# Altium PCB RGB_Plugin_Board.PcbDoc (part 2 of 3)
Units mil, origin at the board's own origin, x right, y up, seen from the top; angles counter-clockwise.
Board outline 2420 x 984.41 mil, 2 copper layers (TOP, BOTTOM), stack 81.54 mil thick; 20 components, 19 nets, 2525 pads, 9 vias.
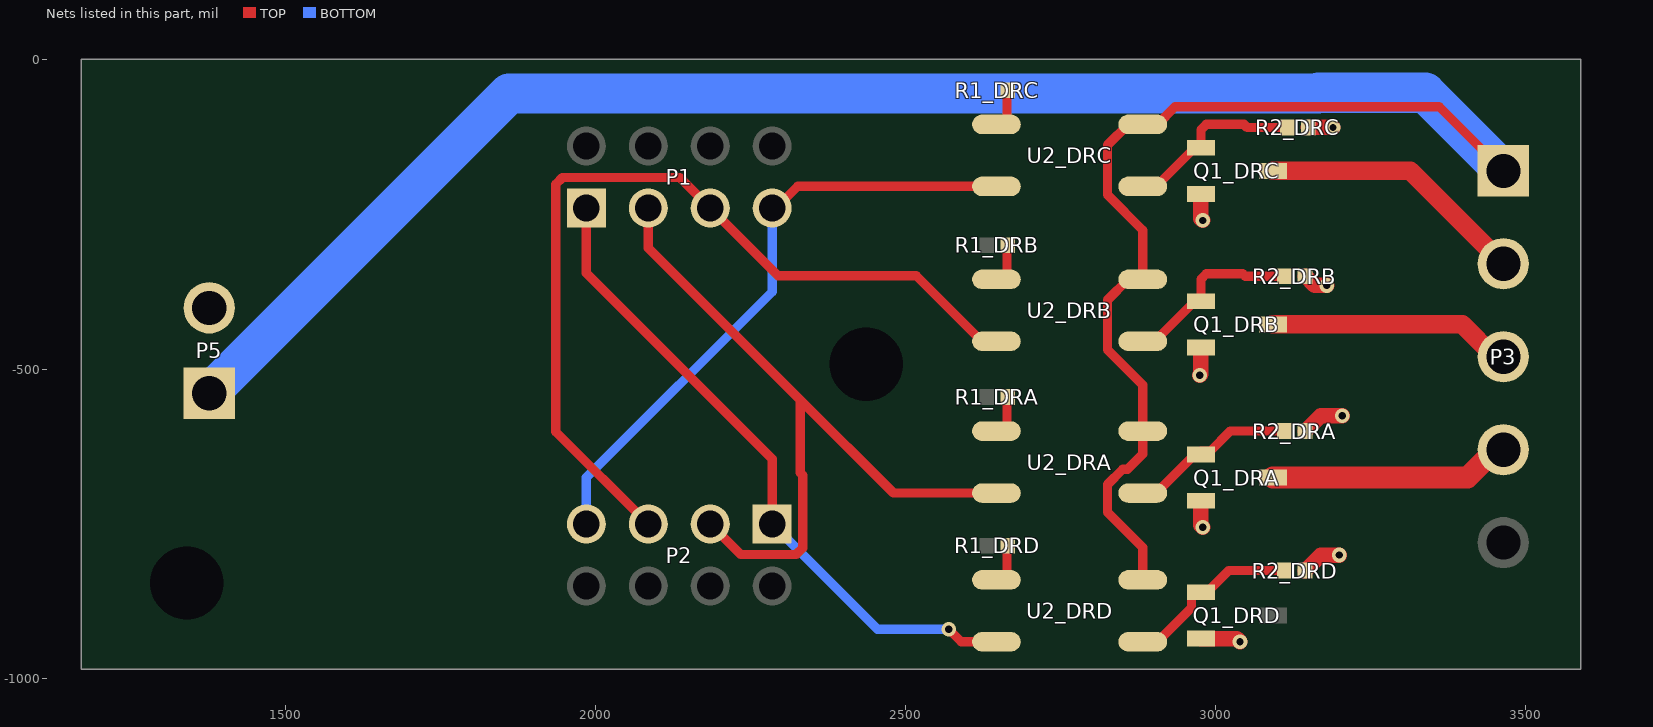
[diagram p2: the nets of this part, all layers, seen from the top]

## Free pads (board coordinates)
  round 0.93 on Top Overlay: 1(1215.25,-148.08) 1(1215.25,-148.08) 1(1215.51,-144.27) 1(1215.51,-144.27) 1(1215.77,-148.33) 1(1215.77,-148.33) 1(1216.01,-143.26) 1(1216.01,-143.26) 1(1216.52,-140.2) 1(1216.52,-140.2) 1(1217.27,-147.82) 1(1217.27,-147.82) 1(1217.79,-137.15) 1(1217.79,-137.15) 1(1218.05,-135.39) 1(1218.05,-135.39) 1(1219.06,-133.34) 1(1219.06,-133.34) 1(1219.32,-145.8) 1(1219.32,-145.8) 1(1219.32,-132.07) 1(1219.32,-132.07) 1(1219.57,-145.02) 1(1219.57,-145.02) 1(1220.07,-144.76) 1(1220.07,-144.76) 1(1220.33,-144.01) 1(1220.33,-144.01) 1(1221.08,-143.26) 1(1221.08,-143.26) 1(1221.08,-128.52) 1(1221.08,-128.52) 1(1221.34,-142.48) 1(1221.34,-142.48) 1(1221.86,-125.73) 1(1221.86,-125.73) 1(1222.11,-141.73) 1(1222.11,-141.73) 1(1222.61,-124.72) 1(1222.61,-124.72) 1(1222.87,-123.45) 1(1222.87,-123.45) 1(1223.12,-139.45) 1(1223.12,-139.45) 1(1223.62,-139.19) 1(1223.62,-139.19) 1(1223.62,-122.18) 1(1223.62,-122.18) 1(1223.88,-120.91) 1(1223.88,-120.91) 1(1223.88,-138.42) 1(1223.88,-138.42) 1(1224.39,-138.18) 1(1224.39,-138.18) 1(1224.39,-38.41) 1(1224.39,-38.41) 1(1224.65,-137.41) 1(1224.65,-137.41) 1(1224.65,-32.33) 1(1224.65,-32.33) 1(1225.15,-45.77) 1(1225.15,-45.77) 1(1225.15,-31.57) 1(1225.15,-31.57) 1(1225.4,-136.65) 1(1225.4,-136.65) 1(1225.41,-118.37) 1(1225.41,-118.37) 1(1225.66,-46.8) 1(1225.66,-46.8) 1(1225.66,-117.1) 1(1225.66,-117.1) 1(1225.66,-135.88) 1(1225.66,-135.88) 1(1225.92,-49.08) 1(1225.92,-49.08) 1(1225.92,-31.31) 1(1225.92,-31.31) 1(1226.16,-31.81) 1(1226.16,-31.81) 1(1226.42,-135.13) 1(1226.42,-135.13) 1(1226.67,-51.36) 1(1226.67,-51.36) 1(1226.67,-31.81) 1(1226.67,-31.81) 1(1227.19,-114.3) 1(1227.19,-114.3) 1(1227.43,-132.85) 1(1227.43,-132.85) 1(1227.43,-113.04) 1(1227.43,-113.04) 1(1227.94,-58.46) 1(1227.94,-58.46) 1(1227.94,-33.6) 1(1227.94,-33.6) 1(1228.2,-132.07) 1(1228.2,-132.07) 1(1228.46,-131.32) 1(1228.46,-131.32) 1(1228.46,-34.86) 1(1228.46,-34.86) 1(1228.7,-34.87) 1(1228.7,-34.87) 1(1229.21,-130.57) 1(1229.21,-130.57) 1(1229.21,-62.03) 1(1229.21,-62.03) 1(1229.47,-129.79) 1(1229.47,-129.79) 1(1229.47,-36.65) 1(1229.47,-36.65) 1(1229.73,-36.65) 1(1229.73,-36.65) 1(1229.97,-108.48) 1(1229.97,-108.48) 1(1229.97,-37.92) 1(1229.97,-37.92) 1(1230.22,-129.04) 1(1230.22,-129.04) 1(1230.22,-107.21) 1(1230.22,-107.21) 1(1230.22,-37.92) 1(1230.22,-37.92) 1(1230.48,-128.27) 1(1230.48,-128.27) 1(1230.48,-67.86) 1(1230.48,-67.86) 1(1230.74,-39.68) 1(1230.74,-39.68) 1(1231,-39.68) 1(1231,-39.68) 1(1231.24,-127.51) 1(1231.24,-127.51) 1(1231.49,-126.76) 1(1231.49,-126.76) 1(1231.75,-42.22) 1(1231.75,-42.22) 1(1232.01,-42.22) 1(1232.01,-42.22) 1(1232.27,-43.49) 1(1232.27,-43.49) 1(1232.5,-43.49) 1(1232.5,-43.49) 1(1233.02,-124.72) 1(1233.02,-124.72) 1(1233.28,-123.96) 1(1233.28,-123.96) 1(1233.28,-101.38) 1(1233.28,-101.38) 1(1233.28,-45.77) 1(1233.28,-45.77) 1(1233.54,-45.77) 1(1233.54,-45.77) 1(1233.77,-77) 1(1233.77,-77) 1(1233.77,-47.04) 1(1233.77,-47.04) 1(1234.03,-78.77) 1(1234.03,-78.77) 1(1234.03,-47.04) 1(1234.03,-47.04) 1(1234.29,-48.31) 1(1234.29,-48.31) 1(1234.55,-122.18) 1(1234.55,-122.18) 1(1234.55,-99.59) 1(1234.55,-99.59) 1(1234.55,-48.31) 1(1234.55,-48.31) 1(1234.8,-80.3) 1(1234.8,-80.3) 1(1234.8,-49.58) 1(1234.8,-49.58) 1(1235.04,-120.91) 1(1235.04,-120.91) 1(1235.04,-98.32) 1(1235.04,-98.32) 1(1235.04,-82.08) 1(1235.04,-82.08) 1(1235.04,-49.58) 1(1235.04,-49.58) 1(1235.56,-120.65) 1(1235.56,-120.65) 1(1235.56,-51.62) 1(1235.56,-51.62) 1(1235.82,-119.9) 1(1235.82,-119.9) 1(1235.82,-51.62) 1(1235.82,-51.62) 1(1236.07,-52.89) 1(1236.07,-52.89) 1(1236.31,-52.89) 1(1236.31,-52.89) 1(1236.57,-119.14) 1(1236.57,-119.14) 1(1236.57,-85.89) 1(1236.57,-85.89) 1(1236.57,-54.16) 1(1236.57,-54.16) 1(1236.83,-87.16) 1(1236.83,-87.16) 1(1236.83,-54.16) 1(1236.83,-54.16) 1(1236.83,-118.37) 1(1236.83,-118.37) 1(1236.83,-95.03) 1(1236.83,-95.03) 1(1237.09,-55.43) 1(1237.09,-55.43) 1(1237.34,-55.43) 1(1237.34,-55.43) 1(1237.58,-56.7) 1(1237.58,-56.7) 1(1237.84,-117.36) 1(1237.84,-117.36) 1(1237.84,-89.18) 1(1237.84,-89.18) 1(1237.84,-56.7) 1(1237.84,-56.7) 1(1238.1,-116.61) 1(1238.1,-116.61) 1(1238.1,-93.25) 1(1238.1,-93.25) 1(1238.1,-90.45) 1(1238.1,-90.45) 1(1238.1,-57.97) 1(1238.1,-57.97) 1(1238.35,-57.97) 1(1238.35,-57.97) 1(1238.61,-91.98) 1(1238.61,-91.98) 1(1238.85,-115.83) 1(1238.85,-115.83) 1(1238.85,-91.72) 1(1238.85,-91.72) 1(1238.85,-59.73) 1(1238.85,-59.73) 1(1239.11,-115.08) 1(1239.11,-115.08) 1(1239.11,-59.73) 1(1239.11,-59.73) 1(1239.37,-61) 1(1239.37,-61) 1(1239.62,-61) 1(1239.62,-61) 1(1239.88,-114.3) 1(1239.88,-114.3) 1(1240.12,-62.79) 1(1240.12,-62.79) 1(1240.38,-113.04) 1(1240.38,-113.04) 1(1240.38,-62.79) 1(1240.38,-62.79) 1(1240.89,-112.8) 1(1240.89,-112.8) 1(1241.15,-112.02) 1(1241.15,-112.02) 1(1241.39,-64.81) 1(1241.39,-64.81) 1(1242.16,-111.01) 1(1242.16,-111.01) 1(1242.42,-68.38) 1(1242.42,-68.38) 1(1242.42,-110.26) 1(1242.42,-110.26) 1(1242.66,-68.38) 1(1242.66,-68.38) 1(1242.92,-110) 1(1242.92,-110) 1(1242.92,-69.65) 1(1242.92,-69.65) 1(1243.17,-109.23) 1(1243.17,-109.23) 1(1243.17,-69.65) 1(1243.17,-69.65) 1(1243.69,-108.99) 1(1243.69,-108.99) 1(1243.93,-108.22) 1(1243.93,-108.22) 1(1244.44,-107.96) 1(1244.44,-107.96) 1(1244.7,-107.21) 1(1244.7,-107.21) 1(1245.45,-106.69) 1(1245.45,-106.69) 1(1245.97,-75.22) 1(1245.97,-75.22) 1(1246.23,-76.49) 1(1246.23,-76.49) 1(1246.46,-76.49) 1(1246.46,-76.49) 1(1246.98,-78.02) 1(1246.98,-78.02) 1(1247.73,-111.01) 1(1247.73,-111.01) 1(1248.51,-76.49) 1(1248.51,-76.49) 1(1248.77,-75.74) 1(1248.77,-75.74) 1(1249.78,-73.95) 1(1249.78,-73.95) 1(1250.53,-73.2) 1(1250.53,-73.2) 1(1250.79,-72.42) 1(1250.79,-72.42) 1(1251.3,-117.87) 1(1251.3,-117.87) 1(1251.54,-118.63) 1(1251.54,-118.63) 1(1251.8,-71.67) 1(1251.8,-71.67) 1(1252.06,-70.92) 1(1252.06,-70.92) 1(1252.57,-70.66) 1(1252.57,-70.66) 1(1252.81,-69.88) 1(1252.81,-69.88) 1(1252.81,-120.41) 1(1252.81,-120.41) 1(1253.07,-121.17) 1(1253.07,-121.17) 1(1253.84,-121.92) 1(1253.84,-121.92) 1(1254.08,-122.69) 1(1254.08,-122.69) 1(1254.34,-68.38) 1(1254.34,-68.38) 1(1254.6,-67.6) 1(1254.6,-67.6) 1(1254.85,-123.45) 1(1254.85,-123.45) 1(1255.11,-124.22) 1(1255.11,-124.22) 1(1255.35,-94) 1(1255.35,-94) 1(1255.61,-124.46) 1(1255.61,-124.46) 1(1255.61,-94) 1(1255.61,-94) 1(1255.61,-65.84) 1(1255.61,-65.84) 1(1255.86,-125.23) 1(1255.86,-125.23) 1(1256.12,-95.27) 1(1256.12,-95.27) 1(1256.38,-95.27) 1(1256.38,-95.27) 1(1256.62,-65.07) 1(1256.62,-65.07) 1(1256.62,-92.73) 1(1256.62,-92.73) 1(1256.88,-91.98) 1(1256.88,-91.98) 1(1256.88,-64.31) 1(1256.88,-64.31) 1(1257.13,-127) 1(1257.13,-127) 1(1257.13,-97.05) 1(1257.13,-97.05) 1(1257.39,-97.05) 1(1257.39,-97.05) 1(1257.39,-127.77) 1(1257.39,-127.77) 1(1257.89,-98.32) 1(1257.89,-98.32) 1(1257.89,-91.22) 1(1257.89,-91.22) 1(1258.14,-98.32) 1(1258.14,-98.32) 1(1258.14,-90.45) 1(1258.14,-90.45) 1(1258.15,-128.52) 1(1258.15,-128.52) 1(1258.4,-129.3) 1(1258.4,-129.3) 1(1258.66,-99.59) 1(1258.66,-99.59) 1(1258.92,-99.59) 1(1258.92,-99.59) 1(1259.16,-130.05) 1(1259.16,-130.05) 1(1259.16,-89.7) 1(1259.16,-89.7) 1(1259.41,-130.8) 1(1259.41,-130.8) 1(1259.41,-100.86) 1(1259.41,-100.86) 1(1259.41,-88.92) 1(1259.41,-88.92) 1(1259.41,-62.03) 1(1259.41,-62.03) 1(1259.67,-100.86) 1(1259.67,-100.86) 1(1259.67,-61.26) 1(1259.67,-61.26) 1(1259.93,-131.06) 1(1259.93,-131.06) 1(1260.19,-131.84) 1(1260.19,-131.84) 1(1260.19,-102.13) 1(1260.19,-102.13) 1(1260.43,-102.13) 1(1260.43,-102.13) 1(1260.68,-132.07) 1(1260.68,-132.07) 1(1260.68,-87.91) 1(1260.68,-87.91) 1(1260.68,-102.88) 1(1260.68,-102.88) 1(1260.68,-60.51) 1(1260.68,-60.51) 1(1260.94,-132.85) 1(1260.94,-132.85) 1(1260.94,-102.88) 1(1260.94,-102.88) 1(1260.94,-87.16) 1(1260.94,-87.16) 1(1260.94,-59.73) 1(1260.94,-59.73) 1(1261.2,-103.66) 1(1261.2,-103.66) 1(1261.46,-133.1) 1(1261.46,-133.1) 1(1261.46,-103.66) 1(1261.46,-103.66) 1(1261.69,-133.86) 1(1261.69,-133.86) 1(1261.69,-104.41) 1(1261.69,-104.41) 1(1261.95,-104.41) 1(1261.95,-104.41) 1(1261.95,-58.98) 1(1261.95,-58.98) 1(1262.21,-105.18) 1(1262.21,-105.18) 1(1262.21,-58.22) 1(1262.21,-58.22) 1(1262.47,-134.37) 1(1262.47,-134.37) 1(1262.47,-105.18) 1(1262.47,-105.18) 1(1262.73,-135.13) 1(1262.73,-135.13) 1(1262.73,-105.94) 1(1262.73,-105.94) 1(1262.96,-105.94) 1(1262.96,-105.94) 1(1263.48,-57.19) 1(1263.48,-57.19) 1(1263.74,-135.88) 1(1263.74,-135.88) 1(1263.74,-56.44) 1(1263.74,-56.44) 1(1264,-136.65) 1(1264,-136.65) 1(1264,-107.72) 1(1264,-107.72) 1(1264.23,-107.72) 1(1264.23,-107.72) 1(1264.75,-108.73) 1(1264.75,-108.73) 1(1265.01,-108.73) 1(1265.01,-108.73) 1(1265.01,-137.41) 1(1265.01,-137.41) 1(1265.26,-138.18) 1(1265.26,-138.18) 1(1265.26,-109.49) 1(1265.26,-109.49) 1(1265.5,-109.49) 1(1265.5,-109.49) 1(1266.02,-110.5) 1(1266.02,-110.5) 1(1266.28,-138.93) 1(1266.28,-138.93) 1(1266.28,-110.5) 1(1266.28,-110.5) 1(1266.53,-139.69) 1(1266.53,-139.69) 1(1266.53,-111.27) 1(1266.53,-111.27) 1(1266.77,-111.27) 1(1266.77,-111.27) 1(1267.29,-112.28) 1(1267.29,-112.28) 1(1267.55,-140.46) 1(1267.55,-140.46) 1(1267.55,-112.28) 1(1267.55,-112.28) 1(1267.8,-141.22) 1(1267.8,-141.22) 1(1267.8,-113.04) 1(1267.8,-113.04) 1(1267.8,-80.55) 1(1267.8,-80.55) 1(1268.04,-113.04) 1(1268.04,-113.04) 1(1268.04,-79.8) 1(1268.04,-79.8) 1(1268.56,-114.07) 1(1268.56,-114.07) 1(1268.81,-114.07) 1(1268.81,-114.07) 1(1269.07,-114.82) 1(1269.07,-114.82) 1(1269.31,-114.82) 1(1269.31,-114.82) 1(1269.31,-78.53) 1(1269.31,-78.53) 1(1269.83,-115.83) 1(1269.83,-115.83) 1(1270.08,-115.83) 1(1270.08,-115.83) 1(1270.08,-78.27) 1(1270.08,-78.27) 1(1270.84,-116.61) 1(1270.84,-116.61) 1(1270.84,-77.26) 1(1270.84,-77.26) 1(1271.09,-117.36) 1(1271.09,-117.36) 1(1271.35,-117.36) 1(1271.35,-117.36) 1(1271.61,-77) 1(1271.61,-77) 1(1272.36,-118.37) 1(1272.36,-118.37) 1(1272.36,-47.81) 1(1272.36,-47.81) 1(1272.62,-119.14) 1(1272.62,-119.14) 1(1272.88,-119.14) 1(1272.88,-119.14) 1(1273.12,-47.56) 1(1273.12,-47.56) 1(1274.15,-74.21) 1(1274.15,-74.21) 1(1274.9,-73.95) 1(1274.9,-73.95) 1(1275.42,-45.02) 1(1275.42,-45.02) 1(1275.42,-121.68) 1(1275.42,-121.68) 1(1275.66,-122.44) 1(1275.66,-122.44) 1(1275.66,-72.94) 1(1275.66,-72.94) 1(1275.91,-122.44) 1(1275.91,-122.44) 1(1276.17,-44.76) 1(1276.17,-44.76) 1(1276.43,-72.68) 1(1276.43,-72.68) 1(1277.18,-150.61) 1(1277.18,-150.61) 1(1277.18,-43.75) 1(1277.18,-43.75) 1(1277.44,-71.41) 1(1277.44,-71.41) 1(1277.96,-150.87) 1(1277.96,-150.87) 1(1277.96,-43.49) 1(1277.96,-43.49) 1(1278.19,-71.15) 1(1278.19,-71.15) 1(1278.71,-42.48) 1(1278.71,-42.48) 1(1278.71,-151.88) 1(1278.71,-151.88) 1(1279.46,-152.14) 1(1279.46,-152.14) 1(1279.46,-42.22) 1(1279.46,-42.22) 1(1279.72,-69.65) 1(1279.72,-69.65) 1(1280.49,-40.95) 1(1280.49,-40.95) 1(1280.49,-153.41) 1(1280.49,-153.41) 1(1280.49,-69.39) 1(1280.49,-69.39) 1(1280.73,-68.87) 1(1280.73,-68.87) 1(1281.25,-153.65) 1(1281.25,-153.65) 1(1281.25,-40.69) 1(1281.25,-40.69) 1(1281.51,-68.62) 1(1281.51,-68.62) 1(1282,-154.68) 1(1282,-154.68) 1(1282,-39.68) 1(1282,-39.68) 1(1282.52,-129.3) 1(1282.52,-129.3) 1(1282.77,-154.92) 1(1282.77,-154.92) 1(1282.77,-39.43) 1(1282.77,-39.43) 1(1283.03,-129.3) 1(1283.03,-129.3) 1(1283.03,-67.11) 1(1283.03,-67.11) 1(1283.27,-155.69) 1(1283.27,-155.69) 1(1283.79,-66.85) 1(1283.79,-66.85) 1(1283.79,-38.41) 1(1283.79,-38.41) 1(1284.04,-155.95) 1(1284.04,-155.95) 1(1284.04,-130.57) 1(1284.04,-130.57) 1(1284.3,-156.44) 1(1284.3,-156.44) 1(1284.54,-130.57) 1(1284.54,-130.57) 1(1284.54,-38.16) 1(1284.54,-38.16) 1(1284.8,-65.84) 1(1284.8,-65.84) 1(1285.06,-156.7) 1(1285.06,-156.7) 1(1285.31,-157.22) 1(1285.31,-157.22) 1(1285.57,-65.58) 1(1285.57,-65.58) 1(1285.57,-37.15) 1(1285.57,-37.15) 1(1285.81,-132.07) 1(1285.81,-132.07) 1(1286.07,-157.46) 1(1286.07,-157.46) 1(1286.32,-132.07) 1(1286.32,-132.07) 1(1286.32,-36.89) 1(1286.32,-36.89) 1(1286.58,-64.57) 1(1286.58,-64.57) 1(1286.84,-158.23) 1(1286.84,-158.23) 1(1287.34,-133.34) 1(1287.34,-133.34) 1(1287.34,-64.31) 1(1287.34,-64.31) 1(1287.34,-35.88) 1(1287.34,-35.88) 1(1287.59,-158.49) 1(1287.59,-158.49) 1(1287.85,-133.34) 1(1287.85,-133.34) 1(1288.35,-159.24) 1(1288.35,-159.24) 1(1288.35,-134.12) 1(1288.35,-134.12) 1(1288.35,-63.3) 1(1288.35,-63.3) 1(1288.86,-134.12) 1(1288.86,-134.12) 1(1289.12,-134.61) 1(1289.12,-134.61) 1(1289.12,-63.04) 1(1289.12,-63.04) 1(1289.38,-62.53) 1(1289.38,-62.53) 1(1289.62,-159.76) 1(1289.62,-159.76) 1(1289.62,-134.61) 1(1289.62,-134.61) 1(1290.13,-34.61) 1(1290.13,-34.61) 1(1290.13,-135.39) 1(1290.13,-135.39) 1(1290.39,-160.51) 1(1290.39,-160.51) 1(1290.65,-135.39) 1(1290.65,-135.39) 1(1290.88,-135.88) 1(1290.88,-135.88) 1(1291.14,-160.77) 1(1291.14,-160.77) 1(1291.14,-61.77) 1(1291.14,-61.77) 1(1291.14,-33.6) 1(1291.14,-33.6) 1(1291.4,-135.88) 1(1291.4,-135.88) 1(1291.92,-61) 1(1291.92,-61) 1(1291.92,-161.52) 1(1291.92,-161.52) 1(1291.92,-136.65) 1(1291.92,-136.65) 1(1292.41,-136.65) 1(1292.41,-136.65) 1(1292.67,-161.78) 1(1292.67,-161.78) 1(1292.67,-137.15) 1(1292.67,-137.15) 1(1292.67,-60.76) 1(1292.67,-60.76) 1(1292.93,-60.25) 1(1292.93,-60.25) 1(1292.93,-32.84) 1(1292.93,-32.84) 1(1293.19,-137.15) 1(1293.19,-137.15) 1(1293.68,-137.92) 1(1293.68,-137.92) 1(1294.2,-137.92) 1(1294.2,-137.92) 1(1294.46,-163.05) 1(1294.46,-163.05) 1(1294.46,-138.42) 1(1294.46,-138.42) 1(1294.69,-59.24) 1(1294.69,-59.24) 1(1294.95,-138.42) 1(1294.95,-138.42) 1(1294.95,-31.57) 1(1294.95,-31.57) 1(1295.21,-163.31) 1(1295.21,-163.31) 1(1295.21,-138.93) 1(1295.21,-138.93) 1(1295.72,-138.93) 1(1295.72,-138.93) 1(1295.96,-58.72) 1(1295.96,-58.72) 1(1295.96,-139.45) 1(1295.96,-139.45) 1(1296.48,-139.45) 1(1296.48,-139.45) 1(1296.74,-139.95) 1(1296.74,-139.95) 1(1296.74,-57.97) 1(1296.74,-57.97) 1(1296.74,-30.54) 1(1296.74,-30.54) 1(1296.99,-164.58) 1(1296.99,-164.58) 1(1297.23,-139.95) 1(1297.23,-139.95) 1(1297.49,-140.46) 1(1297.49,-140.46) 1(1298,-140.46) 1(1298,-140.46) 1(1298.5,-56.96) 1(1298.5,-56.96) 1(1298.76,-141.22) 1(1298.76,-141.22) 1(1299.27,-141.22) 1(1299.27,-141.22) 1(1300.28,-55.92) 1(1300.28,-55.92) 1(1301.55,-55.69) 1(1301.55,-55.69) 1(1301.81,-167.11) 1(1301.81,-167.11) 1(1303.08,-167.37) 1(1303.08,-167.37) 1(1303.58,-167.87) 1(1303.58,-167.87) 1(1304.85,-168.12) 1(1304.85,-168.12) 1(1304.85,-26.24) 1(1304.85,-26.24) 1(1305.88,-168.88) 1(1305.88,-168.88) 1(1306.12,-53.15) 1(1306.12,-53.15) 1(1307.15,-169.14) 1(1307.15,-169.14) 1(1307.38,-52.89) 1(1307.38,-52.89) 1(1307.64,-25.46) 1(1307.64,-25.46) 1(1307.9,-145.8) 1(1307.9,-145.8) 1(1307.9,-52.37) 1(1307.9,-52.37) 1(1308.65,-145.8) 1(1308.65,-145.8) 1(1308.91,-170.15) 1(1308.91,-170.15) 1(1309.17,-24.45) 1(1309.17,-24.45) 1(1309.68,-146.55) 1(1309.68,-146.55) 1(1309.92,-51.88) 1(1309.92,-51.88) 1(1310.44,-146.55) 1(1310.44,-146.55) 1(1310.95,-147.07) 1(1310.95,-147.07) 1(1311.71,-147.07) 1(1311.71,-147.07) 1(1311.96,-50.85) 1(1311.96,-50.85) 1(1312.98,-147.82) 1(1312.98,-147.82) 1(1313.23,-171.67) 1(1313.23,-171.67) 1(1313.49,-23.18) 1(1313.49,-23.18) 1(1313.73,-147.82) 1(1313.73,-147.82) 1(1315.77,-148.83) 1(1315.77,-148.83) 1(1316.27,-49.58) 1(1316.27,-49.58) 1(1316.53,-148.83) 1(1316.53,-148.83) 1(1317.54,-173.2) 1(1317.54,-173.2) 1(1318.05,-149.6) 1(1318.05,-149.6) 1(1318.05,-21.42) 1(1318.05,-21.42) 1(1318.31,-48.57) 1(1318.31,-48.57) 1(1319.06,-149.6) 1(1319.06,-149.6) 1(1319.58,-150.1) 1(1319.58,-150.1) 1(1320.33,-150.1) 1(1320.33,-150.1) 1(1320.33,-21.16) 1(1320.33,-21.16) 1(1320.85,-48.07) 1(1320.85,-48.07) 1(1322.12,-150.61) 1(1322.12,-150.61) 1(1322.38,-47.3) 1(1322.38,-47.3) 1(1322.61,-20.15) 1(1322.61,-20.15) 1(1324.4,-151.37) 1(1324.4,-151.37) 1(1324.66,-174.99) 1(1324.66,-174.99) 1(1325.67,-151.37) 1(1325.67,-151.37) 1(1326.42,-151.88) 1(1326.42,-151.88) 1(1326.42,-46.29) 1(1326.42,-46.29) 1(1326.94,-175.22) 1(1326.94,-175.22) 1(1327.45,-19.38) 1(1327.45,-19.38) 1(1327.69,-151.88) 1(1327.69,-151.88) 1(1328.72,-152.38) 1(1328.72,-152.38) 1(1328.72,-46.03) 1(1328.72,-46.03) 1(1330.23,-152.38) 1(1330.23,-152.38) 1(1331,-45.27) 1(1331,-45.27) 1(1331.26,-152.9) 1(1331.26,-152.9) 1(1331.76,-176.49) 1(1331.76,-176.49) 1(1332.27,-18.11) 1(1332.27,-18.11) 1(1332.53,-152.9) 1(1332.53,-152.9) 1(1333.54,-153.41) 1(1333.54,-153.41) 1(1334.29,-45.02) 1(1334.29,-45.02) 1(1334.81,-153.41) 1(1334.81,-153.41) 1(1335.56,-44.5) 1(1335.56,-44.5) 1(1335.82,-153.91) 1(1335.82,-153.91) 1(1337.09,-153.91) 1(1337.09,-153.91) 1(1338.62,-17.35) 1(1338.62,-17.35) 1(1338.87,-44.26) 1(1338.87,-44.26) 1(1339.37,-154.42) 1(1339.37,-154.42) 1(1339.89,-16.84) 1(1339.89,-16.84) 1(1340.14,-43.75) 1(1340.14,-43.75) 1(1341.91,-154.42) 1(1341.91,-154.42) 1(1343.44,-43.23) 1(1343.44,-43.23) 1(1344.19,-154.92) 1(1344.19,-154.92) 1(1344.45,-178.28) 1(1344.45,-178.28) 1(1346.73,-154.92) 1(1346.73,-154.92) 1(1347.76,-16.08) 1(1347.76,-16.08) 1(1350.53,-42.74) 1(1350.53,-42.74) 1(1351.8,-155.69) 1(1351.8,-155.69) 1(1353.07,-15.83) 1(1353.07,-15.83) 1(1356.88,-155.69) 1(1356.88,-155.69) 1(1358.15,-179.03) 1(1358.15,-179.03) 1(1362.73,-42.48) 1(1362.73,-42.48) 1(1369.57,-16.08) 1(1369.57,-16.08) 1(1370.6,-42.99) 1(1370.6,-42.99) 1(1372.37,-16.08) 1(1372.37,-16.08) 1(1375.68,-43.75) 1(1375.68,-43.75) 1(1376.95,-155.95) 1(1376.95,-155.95) 1(1380.5,-44.01) 1(1380.5,-44.01) 1(1381,-17.1) 1(1381,-17.1) 1(1381.51,-178.79) 1(1381.51,-178.79) 1(1382.52,-44.5) 1(1382.52,-44.5) 1(1384.05,-17.1) 1(1384.05,-17.1) 1(1385.83,-44.76) 1(1385.83,-44.76) 1(1388.61,-45.53) 1(1388.61,-45.53) 1(1390.91,-154.92) 1(1390.91,-154.92) 1(1391.15,-18.11) 1(1391.15,-18.11) 1(1392.68,-46.03) 1(1392.68,-46.03) 1(1393.45,-154.42) 1(1393.45,-154.42) 1(1395.73,-19.12) 1(1395.73,-19.12) 1(1398.53,-47.56) 1(1398.53,-47.56) 1(1398.76,-154.16) 1(1398.76,-154.16) 1(1398.76,-19.12) 1(1398.76,-19.12) 1(1399.79,-177.27) 1(1399.79,-177.27) 1(1400.29,-47.81) 1(1400.29,-47.81) 1(1401.06,-48.31) 1(1401.06,-48.31) 1(1401.82,-20.15) 1(1401.82,-20.15) 1(1403.34,-20.15) 1(1403.34,-20.15) 1(1405.37,-49.08) 1(1405.37,-49.08) 1(1406.14,-49.58) 1(1406.14,-49.58) 1(1407.9,-21.42) 1(1407.9,-21.42) 1(1408.68,-50.09) 1(1408.68,-50.09) 1(1409.43,-21.42) 1(1409.43,-21.42) 1(1409.95,-50.85) 1(1409.95,-50.85) 1(1412.72,-51.36) 1(1412.72,-51.36) 1(1414.25,-175.48) 1(1414.25,-175.48) 1(1417.56,-174.73) 1(1417.56,-174.73) 1(1418.06,-53.39) 1(1418.06,-53.39) 1(1418.83,-151.37) 1(1418.83,-151.37) 1(1420.1,-150.87) 1(1420.1,-150.87) 1(1420.85,-174.47) 1(1420.85,-174.47) 1(1422.38,-54.65) 1(1422.38,-54.65) 1(1422.88,-150.61) 1(1422.88,-150.61) 1(1423.65,-55.43) 1(1423.65,-55.43) 1(1423.91,-24.97) 1(1423.91,-24.97) 1(1427.2,-173.2) 1(1427.2,-173.2) 1(1427.2,-56.44) 1(1427.2,-56.44) 1(1428.47,-26.73) 1(1428.47,-26.73) 1(1428.98,-57.45) 1(1428.98,-57.45) 1(1429.22,-149.35) 1(1429.22,-149.35) 1(1429.48,-26.73) 1(1429.48,-26.73) 1(1430.49,-172.94) 1(1430.49,-172.94) 1(1433.29,-149.09) 1(1433.29,-149.09) 1(1433.55,-172.19) 1(1433.55,-172.19) 1(1434.81,-59.24) 1(1434.81,-59.24) 1(1435.57,-148.33) 1(1435.57,-148.33) 1(1436.34,-171.93) 1(1436.34,-171.93) 1(1436.6,-60.25) 1(1436.6,-60.25) 1(1437.61,-171.42) 1(1437.61,-171.42) 1(1437.87,-60.51) 1(1437.87,-60.51) 1(1437.87,-29.53) 1(1437.87,-29.53) 1(1438.88,-148.08) 1(1438.88,-148.08) 1(1438.88,-29.53) 1(1438.88,-29.53) 1(1439.14,-61.26) 1(1439.14,-61.26) 1(1439.89,-30.3) 1(1439.89,-30.3) 1(1440.64,-30.3) 1(1440.64,-30.3) 1(1441.16,-30.8) 1(1441.16,-30.8) 1(1441.91,-147.3) 1(1441.91,-147.3) 1(1441.91,-30.8) 1(1441.91,-30.8) 1(1443.44,-62.53) 1(1443.44,-62.53) 1(1444.21,-31.81) 1(1444.21,-31.81) 1(1444.71,-63.3) 1(1444.71,-63.3) 1(1445.23,-147.07) 1(1445.23,-147.07) 1(1445.23,-31.81) 1(1445.23,-31.81) 1(1445.98,-63.54) 1(1445.98,-63.54) 1(1446.24,-32.58) 1(1446.24,-32.58) 1(1446.5,-64.05) 1(1446.5,-64.05) 1(1446.75,-169.91) 1(1446.75,-169.91) 1(1446.99,-32.58) 1(1446.99,-32.58) 1(1447.51,-33.08) 1(1447.51,-33.08) 1(1447.76,-64.31) 1(1447.76,-64.31) 1(1448.26,-33.08) 1(1448.26,-33.08) 1(1449.03,-169.14) 1(1449.03,-169.14) 1(1450.56,-34.11) 1(1450.56,-34.11) 1(1450.8,-146.03) 1(1450.8,-146.03) 1(1451.06,-66.08) 1(1451.06,-66.08) 1(1451.31,-168.88) 1(1451.31,-168.88) 1(1451.57,-34.11) 1(1451.57,-34.11) 1(1451.83,-145.54) 1(1451.83,-145.54) 1(1452.58,-34.87) 1(1452.58,-34.87) 1(1453.1,-66.59) 1(1453.1,-66.59) 1(1453.34,-34.87) 1(1453.34,-34.87) 1(1453.59,-168.12) 1(1453.59,-168.12) 1(1453.85,-35.38) 1(1453.85,-35.38) 1(1454.61,-35.38) 1(1454.61,-35.38) 1(1455.12,-67.86) 1(1455.12,-67.86) 1(1455.12,-145.28) 1(1455.12,-145.28) 1(1455.12,-35.88) 1(1455.12,-35.88) 1(1455.87,-167.87) 1(1455.87,-167.87) 1(1455.87,-35.88) 1(1455.87,-35.88) 1(1456.39,-68.12) 1(1456.39,-68.12) 1(1456.39,-36.39) 1(1456.39,-36.39) 1(1457.14,-36.39) 1(1457.14,-36.39) 1(1458.18,-167.11) 1(1458.18,-167.11) 1(1458.67,-144.27) 1(1458.67,-144.27) 1(1458.93,-37.4) 1(1458.93,-37.4) 1(1458.93,-69.65) 1(1458.93,-69.65) 1(1459.68,-37.4) 1(1459.68,-37.4) 1(1460.2,-69.88) 1(1460.2,-69.88) 1(1460.2,-37.92) 1(1460.2,-37.92) 1(1460.46,-166.86) 1(1460.46,-166.86) 1(1460.95,-37.92) 1(1460.95,-37.92) 1(1461.47,-70.66) 1(1461.47,-70.66) 1(1461.98,-144.01) 1(1461.98,-144.01) 1(1462.74,-166.1) 1(1462.74,-166.1) 1(1462.74,-70.92) 1(1462.74,-70.92) 1(1463.49,-39.43) 1(1463.49,-39.43) 1(1464.26,-39.43) 1(1464.26,-39.43) 1(1464.76,-72.19) 1(1464.76,-72.19) 1(1464.76,-39.94) 1(1464.76,-39.94) 1(1465.02,-165.84) 1(1465.02,-165.84) 1(1465.53,-143) 1(1465.53,-143) 1(1465.53,-39.94) 1(1465.53,-39.94) 1(1466.03,-72.42) 1(1466.03,-72.42) 1(1466.03,-40.46) 1(1466.03,-40.46) 1(1466.8,-40.46) 1(1466.8,-40.46) 1(1468.57,-164.83) 1(1468.57,-164.83) 1(1469.08,-142.48) 1(1469.08,-142.48) 1(1471.88,-75.48) 1(1471.88,-75.48) 1(1472.14,-164.32) 1(1472.14,-164.32) 1(1472.37,-141.47) 1(1472.37,-141.47) 1(1473.15,-43.75) 1(1473.15,-43.75) 1(1473.9,-43.75) 1(1473.9,-43.75) 1(1475.69,-77.5) 1(1475.69,-77.5) 1(1476.95,-77.76) 1(1476.95,-77.76) 1(1477.21,-140.96) 1(1477.21,-140.96) 1(1479.23,-162.3) 1(1479.23,-162.3) 1(1479.49,-46.8) 1(1479.49,-46.8) 1(1480.25,-46.8) 1(1480.25,-46.8) 1(1481.26,-139.95) 1(1481.26,-139.95) 1(1482.78,-48.31) 1(1482.78,-48.31) 1(1483.04,-139.19) 1(1483.04,-139.19) 1(1483.56,-48.31) 1(1483.56,-48.31) 1(1483.8,-48.83) 1(1483.8,-48.83) 1(1484.31,-48.83) 1(1484.31,-48.83) 1(1484.57,-81.82) 1(1484.57,-81.82) 1(1485.06,-49.58) 1(1485.06,-49.58) 1(1485.58,-49.58) 1(1485.58,-49.58) 1(1487.37,-50.85) 1(1487.37,-50.85) 1(1487.86,-50.85) 1(1487.86,-50.85) 1(1490.14,-137.92) 1(1490.14,-137.92) 1(1492.44,-53.39) 1(1492.44,-53.39) 1(1493.2,-53.39) 1(1493.2,-53.39) 1(1493.45,-53.9) 1(1493.45,-53.9) 1(1493.95,-53.9) 1(1493.95,-53.9) 1(1494.72,-54.65) 1(1494.72,-54.65) 1(1494.98,-86.9) 1(1494.98,-86.9) 1(1495.22,-54.66) 1(1495.22,-54.66) 1(1495.73,-136.65) 1(1495.73,-136.65) 1(1495.73,-87.65) 1(1495.73,-87.65) 1(1496.49,-87.91) 1(1496.49,-87.91) 1(1497,-55.92) 1(1497,-55.92) 1(1497.52,-55.92) 1(1497.52,-55.92) 1(1497.52,-135.88) 1(1497.52,-135.88) 1(1498.27,-89.18) 1(1498.27,-89.18) 1(1499.8,-57.19) 1(1499.8,-57.19) 1(1500.06,-90.19) 1(1500.06,-90.19) 1(1500.55,-57.97) 1(1500.55,-57.97) 1(1501.07,-57.97) 1(1501.07,-57.97) 1(1501.82,-58.72) 1(1501.82,-58.72) 1(1502.34,-156.44) 1(1502.34,-156.44) 1(1502.34,-58.72) 1(1502.34,-58.72) 1(1503.09,-59.49) 1(1503.09,-59.49) 1(1503.61,-59.49) 1(1503.61,-59.49) 1(1504.1,-156.19) 1(1504.1,-156.19) 1(1504.36,-60.25) 1(1504.36,-60.25) 1(1504.88,-134.61) 1(1504.88,-134.61) 1(1504.88,-60.25) 1(1504.88,-60.25) 1(1505.37,-92.99) 1(1505.37,-92.99) 1(1505.89,-155.43) 1(1505.89,-155.43) 1(1506.9,-61.52) 1(1506.9,-61.52) 1(1507.16,-94) 1(1507.16,-94) 1(1507.67,-155.18) 1(1507.67,-155.18) 1(1508.68,-133.34) 1(1508.68,-133.34) 1(1508.68,-62.79) 1(1508.68,-62.79) 1(1508.94,-95.03) 1(1508.94,-95.03) 1(1509.18,-62.79) 1(1509.18,-62.79) 1(1509.44,-63.3) 1(1509.44,-63.3) 1(1509.44,-154.42) 1(1509.44,-154.42) 1(1509.95,-63.3) 1(1509.95,-63.3) 1(1510.71,-96.04) 1(1510.71,-96.04) 1(1510.71,-64.05) 1(1510.71,-64.05) 1(1511.22,-154.16) 1(1511.22,-154.16) 1(1511.22,-64.05) 1(1511.22,-64.05) 1(1512.49,-132.59) 1(1512.49,-132.59) 1(1512.49,-97.05) 1(1512.49,-97.05) 1(1512.99,-153.41) 1(1512.99,-153.41) 1(1513.24,-65.32) 1(1513.24,-65.32) 1(1514.25,-98.06) 1(1514.25,-98.06) 1(1514.77,-153.15) 1(1514.77,-153.15) 1(1515.03,-66.59) 1(1515.03,-66.59) 1(1515.52,-66.59) 1(1515.52,-66.59) 1(1515.78,-67.11) 1(1515.78,-67.11) 1(1516.04,-99.08) 1(1516.04,-99.08) 1(1516.3,-67.11) 1(1516.3,-67.11) 1(1516.56,-67.6) 1(1516.56,-67.6) 1(1516.56,-152.38) 1(1516.56,-152.38) 1(1517.05,-67.6) 1(1517.05,-67.6) 1(1517.31,-99.59) 1(1517.31,-99.59) 1(1517.31,-68.12) 1(1517.31,-68.12) 1(1517.83,-131.32) 1(1517.83,-131.32) 1(1517.83,-68.12) 1(1517.83,-68.12) 1(1518.06,-68.62) 1(1518.06,-68.62) 1(1518.32,-152.14) 1(1518.32,-152.14) 1(1518.58,-68.62) 1(1518.58,-68.62) 1(1518.84,-69.13) 1(1518.84,-69.13) 1(1519.09,-100.86) 1(1519.09,-100.86) 1(1519.33,-69.13) 1(1519.33,-69.13) 1(1519.59,-69.65) 1(1519.59,-69.65) 1(1519.59,-130.57) 1(1519.59,-130.57) 1(1519.85,-101.12) 1(1519.85,-101.12) 1(1520.11,-151.37) 1(1520.11,-151.37) 1(1520.11,-69.65) 1(1520.11,-69.65) 1(1520.86,-70.4) 1(1520.86,-70.4) 1(1521.37,-70.4) 1(1521.37,-70.4) 1(1521.87,-151.11) 1(1521.87,-151.11) 1(1521.87,-130.31) 1(1521.87,-130.31) 1(1521.87,-102.65) 1(1521.87,-102.65) 1(1522.39,-71.41) 1(1522.39,-71.41) 1(1522.9,-71.41) 1(1522.9,-71.41) 1(1523.4,-72.19) 1(1523.4,-72.19) 1(1523.66,-129.53) 1(1523.66,-129.53) 1(1523.66,-103.66) 1(1523.66,-103.66) 1(1523.91,-72.19) 1(1523.91,-72.19) 1(1524.41,-72.94) 1(1524.41,-72.94) 1(1524.67,-150.1) 1(1524.67,-150.1) 1(1524.92,-104.15) 1(1524.92,-104.15) 1(1524.92,-72.94) 1(1524.92,-72.94) 1(1525.18,-73.46) 1(1525.18,-73.46) 1(1525.68,-73.46) 1(1525.68,-73.46) 1(1525.94,-73.95) 1(1525.94,-73.95) 1(1526.45,-73.95) 1(1526.45,-73.95) 1(1526.71,-105.42) 1(1526.71,-105.42) 1(1527.2,-129.04) 1(1527.2,-129.04) 1(1527.2,-74.72) 1(1527.2,-74.72) 1(1527.46,-149.6) 1(1527.46,-149.6) 1(1527.72,-74.72) 1(1527.72,-74.72) 1(1528.47,-106.19) 1(1528.47,-106.19) 1(1528.73,-75.74) 1(1528.73,-75.74) 1(1529.25,-148.83) 1(1529.25,-148.83) 1(1529.25,-106.95) 1(1529.25,-106.95) 1(1529.25,-75.74) 1(1529.25,-75.74) 1(1529.74,-76.49) 1(1529.74,-76.49) 1(1530,-128.03) 1(1530,-128.03) 1(1530,-107.21) 1(1530,-107.21) 1(1530.26,-76.49) 1(1530.26,-76.49) 1(1530.75,-107.96) 1(1530.75,-107.96) 1(1530.75,-77.26) 1(1530.75,-77.26) 1(1531.01,-148.57) 1(1531.01,-148.57) 1(1531.27,-77.26) 1(1531.27,-77.26) 1(1531.53,-108.22) 1(1531.53,-108.22) 1(1531.53,-77.76) 1(1531.53,-77.76) 1(1532.02,-77.76) 1(1532.02,-77.76) 1(1532.28,-108.99) 1(1532.28,-108.99) 1(1532.28,-78.27) 1(1532.28,-78.27) 1(1532.8,-147.82) 1(1532.8,-147.82) 1(1532.8,-127.51) 1(1532.8,-127.51) 1(1532.8,-78.27) 1(1532.8,-78.27) 1(1533.06,-109.23) 1(1533.06,-109.23) 1(1533.55,-79.03) 1(1533.55,-79.03) 1(1533.81,-110) 1(1533.81,-110) 1(1534.07,-79.03) 1(1534.07,-79.03) 1(1534.56,-147.56) 1(1534.56,-147.56) 1(1534.56,-126.76) 1(1534.56,-126.76) 1(1534.56,-110.26) 1(1534.56,-110.26) 1(1535.08,-80.04) 1(1535.08,-80.04) 1(1535.59,-80.04) 1(1535.59,-80.04) 1(1536.09,-80.81) 1(1536.09,-80.81) 1(1536.35,-146.81) 1(1536.35,-146.81) 1(1536.6,-111.77) 1(1536.6,-111.77) 1(1536.6,-80.81) 1(1536.6,-80.81) 1(1537.1,-81.57) 1(1537.1,-81.57) 1(1537.36,-112.02) 1(1537.36,-112.02) 1(1537.62,-81.57) 1(1537.62,-81.57) 1(1537.87,-82.08) 1(1537.87,-82.08) 1(1538.13,-146.55) 1(1538.13,-146.55) 1(1538.37,-125.99) 1(1538.37,-125.99) 1(1538.37,-82.08) 1(1538.37,-82.08) 1(1538.63,-82.58) 1(1538.63,-82.58) 1(1539.14,-113.29) 1(1539.14,-113.29) 1(1539.14,-82.58) 1(1539.14,-82.58) 1(1539.4,-83.09) 1(1539.4,-83.09) 1(1539.9,-145.8) 1(1539.9,-145.8) 1(1539.9,-113.55) 1(1539.9,-113.55) 1(1539.9,-83.09) 1(1539.9,-83.09) 1(1540.15,-83.61) 1(1540.15,-83.61) 1(1540.67,-83.61) 1(1540.67,-83.61) 1(1541.17,-84.36) 1(1541.17,-84.36) 1(1541.68,-145.54) 1(1541.68,-145.54) 1(1541.68,-114.82) 1(1541.68,-114.82) 1(1541.68,-84.36) 1(1541.68,-84.36) 1(1542.18,-124.72) 1(1542.18,-124.72) 1(1542.18,-85.12) 1(1542.18,-85.12) 1(1542.43,-115.08) 1(1542.43,-115.08) 1(1542.69,-85.12) 1(1542.69,-85.12) 1(1543.21,-115.83) 1(1543.21,-115.83) 1(1543.21,-85.89) 1(1543.21,-85.89) 1(1543.45,-144.76) 1(1543.45,-144.76) 1(1543.7,-85.89) 1(1543.7,-85.89) 1(1543.96,-116.09) 1(1543.96,-116.09) 1(1544.22,-86.64) 1(1544.22,-86.64) 1(1544.71,-116.84) 1(1544.71,-116.84) 1(1544.71,-86.64) 1(1544.71,-86.64) 1(1544.97,-124.22) 1(1544.97,-124.22) 1(1544.97,-87.16) 1(1544.97,-87.16) 1(1545.23,-144.53) 1(1545.23,-144.53) 1(1545.49,-117.1) 1(1545.49,-117.1) 1(1545.49,-87.16) 1(1545.49,-87.16) 1(1545.75,-87.65) 1(1545.75,-87.65) 1(1546.24,-117.87) 1(1546.24,-117.87) 1(1546.24,-87.65) 1(1546.24,-87.65) 1(1546.5,-88.17) 1(1546.5,-88.17) 1(1546.76,-143.75) 1(1546.76,-143.75) 1(1547.02,-118.11) 1(1547.02,-118.11) 1(1547.02,-88.17) 1(1547.02,-88.17) 1(1547.51,-88.92) 1(1547.51,-88.92) 1(1547.77,-123.19) 1(1547.77,-123.19) 1(1547.77,-118.89) 1(1547.77,-118.89) 1(1548.03,-88.92) 1(1548.03,-88.92) 1(1548.52,-143.5) 1(1548.52,-143.5) 1(1548.52,-119.14) 1(1548.52,-119.14) 1(1548.52,-89.7) 1(1548.52,-89.7) 1(1549.04,-89.7) 1(1549.04,-89.7) 1(1549.3,-119.9) 1(1549.3,-119.9) 1(1549.55,-122.95) 1(1549.55,-122.95) 1(1549.55,-90.45) 1(1549.55,-90.45) 1(1550.05,-90.45) 1(1550.05,-90.45) 1(1550.57,-91.22) 1(1550.57,-91.22) 1(1550.82,-142.48) 1(1550.82,-142.48) 1(1551.06,-91.22) 1(1551.06,-91.22) 1(1551.32,-121.17) 1(1551.32,-121.17) 1(1551.58,-91.98) 1(1551.58,-91.98) 1(1552.09,-121.43) 1(1552.09,-121.43) 1(1552.09,-91.98) 1(1552.09,-91.98) 1(1552.33,-122.18) 1(1552.33,-122.18) 1(1552.59,-92.73) 1(1552.59,-92.73) 1(1552.59,-142.23) 1(1552.59,-142.23) 1(1553.1,-92.73) 1(1553.1,-92.73) 1(1553.6,-93.5) 1(1553.6,-93.5) 1(1554.11,-93.5) 1(1554.11,-93.5) 1(1554.63,-94.26) 1(1554.63,-94.26) 1(1555.13,-94.26) 1(1555.13,-94.26) 1(1555.64,-95.03) 1(1555.64,-95.03) 1(1556.14,-95.03) 1(1556.14,-95.03) 1(1557.17,-96.3) 1(1557.17,-96.3) 1(1557.66,-96.3) 1(1557.66,-96.3) 1(1558.68,-97.57) 1(1558.68,-97.57) 1(1559.19,-97.57) 1(1559.19,-97.57) 1(1559.71,-139.69) 1(1559.71,-139.69) 1(1559.71,-98.32) 1(1559.71,-98.32) 1(1560.2,-98.32) 1(1560.2,-98.32) 1(1560.72,-99.08) 1(1560.72,-99.08) 1(1561.21,-99.08) 1(1561.21,-99.08) 1(1561.47,-139.45) 1(1561.47,-139.45) 1(1561.73,-99.85) 1(1561.73,-99.85) 1(1562.25,-99.85) 1(1562.25,-99.85) 1(1562.74,-100.6) 1(1562.74,-100.6) 1(1563.26,-138.68) 1(1563.26,-138.68) 1(1563.26,-100.6) 1(1563.26,-100.6) 1(1563.75,-101.38) 1(1563.75,-101.38) 1(1564.27,-101.38) 1(1564.27,-101.38) 1(1564.78,-102.13) 1(1564.78,-102.13) 1(1565.02,-138.42) 1(1565.02,-138.42) 1(1565.28,-102.13) 1(1565.28,-102.13) 1(1566.29,-103.4) 1(1566.29,-103.4) 1(1566.81,-103.4) 1(1566.81,-103.4) 1(1567.56,-104.41) 1(1567.56,-104.41) 1(1568.08,-104.41) 1(1568.08,-104.41) 1(1569.09,-105.68) 1(1569.09,-105.68) 1(1569.6,-105.68) 1(1569.6,-105.68) 1(1570.61,-106.95) 1(1570.61,-106.95) 1(1571.13,-106.95) 1(1571.13,-106.95) 1(1571.62,-107.72) 1(1571.62,-107.72) 1(1572.14,-107.72) 1(1572.14,-107.72) 1(1572.64,-135.64) 1(1572.64,-135.64) 1(1572.64,-108.48) 1(1572.64,-108.48) 1(1573.15,-108.48) 1(1573.15,-108.48) 1(1573.41,-135.88) 1(1573.41,-135.88) 1(1573.67,-109.23) 1(1573.67,-109.23) 1(1574.16,-136.14) 1(1574.16,-136.14) 1(1574.16,-109.23) 1(1574.16,-109.23) 1(1575.17,-137.15) 1(1575.17,-137.15) 1(1575.95,-137.41) 1(1575.95,-137.41) 1(1576.21,-111.53) 1(1576.21,-111.53) 1(1576.7,-138.18) 1(1576.7,-138.18) 1(1576.7,-111.53) 1(1576.7,-111.53) 1(1576.96,-112.02) 1(1576.96,-112.02) 1(1577.47,-138.42) 1(1577.47,-138.42) 1(1577.47,-112.02) 1(1577.47,-112.02) 1(1578.23,-139.19) 1(1578.23,-139.19) 1(1578.49,-113.29) 1(1578.49,-113.29) 1(1578.98,-139.45) 1(1578.98,-139.45) 1(1578.98,-113.29) 1(1578.98,-113.29) 1(1579.5,-114.07) 1(1579.5,-114.07) 1(1579.75,-140.2) 1(1579.75,-140.2) 1(1580.01,-114.07) 1(1580.01,-114.07) 1(1580.25,-114.56) 1(1580.25,-114.56) 1(1580.51,-140.46) 1(1580.51,-140.46) 1(1581.28,-141.22) 1(1581.28,-141.22) 1(1582.04,-141.47) 1(1582.04,-141.47) 1(1583.05,-142.48) 1(1583.05,-142.48) 1(1583.82,-142.74) 1(1583.82,-142.74) 1(1584.32,-113.55) 1(1584.32,-113.55) 1(1584.58,-143.5) 1(1584.58,-143.5) 1(1585.33,-143.75) 1(1585.33,-143.75) 1(1586.1,-112.8) 1(1586.1,-112.8) 1(1586.36,-144.76) 1(1586.36,-144.76) 1(1587.11,-145.02) 1(1587.11,-145.02) 1(1587.86,-145.8) 1(1587.86,-145.8) 1(1587.86,-112.54) 1(1587.86,-112.54) 1(1588.64,-146.03) 1(1588.64,-146.03) 1(1588.9,-146.55) 1(1588.9,-146.55) 1(1589.65,-146.81) 1(1589.65,-146.81) 1(1589.65,-111.77) 1(1589.65,-111.77) 1(1590.41,-147.56) 1(1590.41,-147.56) 1(1591.18,-147.82) 1(1591.18,-147.82) 1(1591.44,-111.53) 1(1591.44,-111.53) 1(1592.19,-148.83) 1(1592.19,-148.83) 1(1593.2,-110.76) 1(1593.2,-110.76) 1(1594.21,-150.1) 1(1594.21,-150.1) 1(1594.99,-150.36) 1(1594.99,-150.36) 1(1594.99,-110.5) 1(1594.99,-110.5) 1(1595.24,-150.87) 1(1595.24,-150.87) 1(1596,-151.11) 1(1596,-151.11) 1(1596.25,-151.63) 1(1596.25,-151.63) 1(1596.25,-128.03) 1(1596.25,-128.03) 1(1596.51,-128.52) 1(1596.51,-128.52) 1(1596.75,-109.74) 1(1596.75,-109.74) 1(1597.01,-151.88) 1(1597.01,-151.88) 1(1597.01,-128.52) 1(1597.01,-128.52) 1(1597.27,-152.38) 1(1597.27,-152.38) 1(1598.02,-152.64) 1(1598.02,-152.64) 1(1598.28,-153.15) 1(1598.28,-153.15) 1(1598.53,-109.49) 1(1598.53,-109.49) 1(1599.05,-153.41) 1(1599.05,-153.41) 1(1599.29,-153.91) 1(1599.29,-153.91) 1(1599.29,-131.06) 1(1599.29,-131.06) 1(1599.8,-131.06) 1(1599.8,-131.06) 1(1600.06,-154.16) 1(1600.06,-154.16) 1(1600.32,-154.68) 1(1600.32,-154.68) 1(1600.82,-132.33) 1(1600.82,-132.33) 1(1601.07,-154.92) 1(1601.07,-154.92) 1(1601.07,-108.48) 1(1601.07,-108.48) 1(1601.33,-132.33) 1(1601.33,-132.33) 1(1602.08,-155.95) 1(1602.08,-155.95) 1(1602.86,-156.19) 1(1602.86,-156.19) 1(1602.86,-134.12) 1(1602.86,-134.12) 1(1602.86,-108.22) 1(1602.86,-108.22) 1(1603.35,-134.12) 1(1603.35,-134.12) 1(1603.87,-157.22) 1(1603.87,-157.22) 1(1604.62,-157.46) 1(1604.62,-157.46) 1(1604.62,-107.46) 1(1604.62,-107.46) 1(1604.88,-157.97) 1(1604.88,-157.97) 1(1605.14,-136.14) 1(1605.14,-136.14) 1(1605.63,-158.23) 1(1605.63,-158.23) 1(1605.63,-136.14) 1(1605.63,-136.14) 1(1606.41,-158.98) 1(1606.41,-158.98) 1(1606.41,-124.46) 1(1606.41,-124.46) 1(1606.41,-107.21) 1(1606.41,-107.21) 1(1607.16,-159.24) 1(1607.16,-159.24) 1(1607.16,-137.92) 1(1607.16,-137.92) 1(1607.16,-106.69) 1(1607.16,-106.69) 1(1607.68,-137.92) 1(1607.68,-137.92) 1(1608.17,-160.25) 1(1608.17,-160.25) 1(1608.94,-160.51) 1(1608.94,-160.51) 1(1609.96,-161.52) 1(1609.96,-161.52) 1(1609.96,-106.19) 1(1609.96,-106.19) 1(1610.22,-140.72) 1(1610.22,-140.72) 1(1610.71,-161.78) 1(1610.71,-161.78) 1(1610.71,-140.72) 1(1610.71,-140.72) 1(1610.97,-162.3) 1(1610.97,-162.3) 1(1611.48,-141.73) 1(1611.48,-141.73) 1(1611.74,-162.53) 1(1611.74,-162.53) 1(1611.74,-105.42) 1(1611.74,-105.42) 1(1611.98,-141.73) 1(1611.98,-141.73) 1(1612.5,-163.31) 1(1612.5,-163.31) 1(1613.01,-122.18) 1(1613.01,-122.18) 1(1613.25,-163.56) 1(1613.25,-163.56) 1(1613.51,-164.06) 1(1613.51,-164.06) 1(1613.51,-143.5) 1(1613.51,-143.5) 1(1613.51,-105.18) 1(1613.51,-105.18) 1(1614.02,-143.5) 1(1614.02,-143.5) 1(1614.28,-164.32) 1(1614.28,-164.32) 1(1614.28,-144.27) 1(1614.28,-144.27) 1(1614.52,-144.27) 1(1614.52,-144.27) 1(1615.03,-165.07) 1(1615.03,-165.07) 1(1615.29,-104.41) 1(1615.29,-104.41) 1(1615.79,-165.33) 1(1615.79,-165.33) 1(1615.79,-145.8) 1(1615.79,-145.8) 1(1616.3,-145.8) 1(1616.3,-145.8) 1(1616.56,-121.17) 1(1616.56,-121.17) 1(1616.82,-166.34) 1(1616.82,-166.34) 1(1617.05,-104.15) 1(1617.05,-104.15) 1(1617.57,-166.6) 1(1617.57,-166.6) 1(1618.33,-167.37) 1(1618.33,-167.37) 1(1618.84,-103.4) 1(1618.84,-103.4) 1(1619.1,-167.61) 1(1619.1,-167.61) 1(1619.36,-119.9) 1(1619.36,-119.9) 1(1619.36,-168.12) 1(1619.36,-168.12) 1(1620.11,-168.38) 1(1620.11,-168.38) 1(1620.11,-149.84) 1(1620.11,-149.84) 1(1620.63,-149.84) 1(1620.63,-149.84) 1(1620.63,-103.14) 1(1620.63,-103.14) 1(1621.12,-169.39) 1(1621.12,-169.39) 1(1621.89,-169.65) 1(1621.89,-169.65) 1(1622.13,-170.15) 1(1622.13,-170.15) 1(1622.39,-102.39) 1(1622.39,-102.39) 1(1622.65,-152.14) 1(1622.65,-152.14) 1(1622.91,-170.4) 1(1622.91,-170.4) 1(1622.91,-118.89) 1(1622.91,-118.89) 1(1623.16,-152.14) 1(1623.16,-152.14) 1(1623.92,-171.42) 1(1623.92,-171.42) 1(1624.18,-102.13) 1(1624.18,-102.13) 1(1624.67,-171.67) 1(1624.67,-171.67) 1(1624.93,-101.61) 1(1624.93,-101.61) 1(1625.19,-172.45) 1(1625.19,-172.45) 1(1625.7,-154.92) 1(1625.7,-154.92) 1(1625.7,-117.62) 1(1625.7,-117.62) 1(1625.94,-172.69) 1(1625.94,-172.69) 1(1626.2,-173.2) 1(1626.2,-173.2) 1(1626.2,-154.92) 1(1626.2,-154.92) 1(1626.72,-101.38) 1(1626.72,-101.38) 1(1626.97,-173.46) 1(1626.97,-173.46) 1(1627.21,-173.96) 1(1627.21,-173.96) 1(1627.98,-174.21) 1(1627.98,-174.21) 1(1628.24,-174.73) 1(1628.24,-174.73) 1(1628.48,-157.46) 1(1628.48,-157.46) 1(1628.99,-174.99) 1(1628.99,-174.99) 1(1628.99,-157.46) 1(1628.99,-157.46) 1(1629.25,-175.48) 1(1629.25,-175.48) 1(1629.25,-116.61) 1(1629.25,-116.61) 1(1629.25,-100.34) 1(1629.25,-100.34) 1(1630.01,-175.74) 1(1630.01,-175.74) 1(1631.02,-176.75) 1(1631.02,-176.75) 1(1631.02,-100.11) 1(1631.02,-100.11) 1(1631.79,-177.01) 1(1631.79,-177.01) 1(1632.05,-115.34) 1(1632.05,-115.34) 1(1632.29,-161.03) 1(1632.29,-161.03) 1(1632.8,-178.02) 1(1632.8,-178.02) 1(1632.8,-161.03) 1(1632.8,-161.03) 1(1633.55,-178.28) 1(1633.55,-178.28) 1(1633.55,-99.08) 1(1633.55,-99.08) 1(1634.58,-179.29) 1(1634.58,-179.29) 1(1635.08,-163.56) 1(1635.08,-163.56) 1(1635.34,-179.55) 1(1635.34,-179.55) 1(1635.34,-98.84) 1(1635.34,-98.84) 1(1635.6,-180.06) 1(1635.6,-180.06) 1(1635.6,-163.56) 1(1635.6,-163.56) 1(1636.35,-180.3) 1(1636.35,-180.3) 1(1636.61,-180.82) 1(1636.61,-180.82) 1(1637.13,-98.06) 1(1637.13,-98.06) 1(1637.36,-181.07) 1(1637.36,-181.07) 1(1637.62,-181.57) 1(1637.62,-181.57) 1(1638.39,-181.83) 1(1638.39,-181.83) 1(1638.63,-182.34) 1(1638.63,-182.34) 1(1638.89,-97.81) 1(1638.89,-97.81) 1(1639.41,-182.6) 1(1639.41,-182.6) 1(1639.66,-97.31) 1(1639.66,-97.31) 1(1639.66,-183.1) 1(1639.66,-183.1) 1(1640.16,-112.8) 1(1640.16,-112.8) 1(1640.42,-183.36) 1(1640.42,-183.36) 1(1640.67,-183.87) 1(1640.67,-183.87) 1(1641.43,-184.11) 1(1641.43,-184.11) 1(1641.43,-169.65) 1(1641.43,-169.65) 1(1641.43,-112.02) 1(1641.43,-112.02) 1(1641.43,-97.05) 1(1641.43,-97.05) 1(1641.69,-184.62) 1(1641.69,-184.62) 1(1641.94,-169.65) 1(1641.94,-169.65) 1(1642.44,-184.88) 1(1642.44,-184.88) 1(1642.7,-185.38) 1(1642.7,-185.38) 1(1642.7,-111.77) 1(1642.7,-111.77) 1(1643.21,-96.3) 1(1643.21,-96.3) 1(1643.47,-185.64) 1(1643.47,-185.64) 1(1643.97,-111.01) 1(1643.97,-111.01) 1(1644.48,-186.65) 1(1644.48,-186.65) 1(1644.48,-172.45) 1(1644.48,-172.45) 1(1644.98,-172.45) 1(1644.98,-172.45) 1(1644.98,-96.04) 1(1644.98,-96.04) 1(1645.24,-186.9) 1(1645.24,-186.9) 1(1645.49,-187.42) 1(1645.49,-187.42) 1(1645.75,-95.53) 1(1645.75,-95.53) 1(1646.24,-187.68) 1(1646.24,-187.68) 1(1646.5,-188.17) 1(1646.5,-188.17) 1(1647.28,-188.43) 1(1647.28,-188.43) 1(1647.52,-188.95) 1(1647.52,-188.95) 1(1648.29,-189.18) 1(1648.29,-189.18) 1(1648.55,-95.03) 1(1648.55,-95.03) 1(1649.3,-190.22) 1(1649.3,-190.22) 1(1649.82,-177.53) 1(1649.82,-177.53) 1(1649.82,-109.23) 1(1649.82,-109.23) 1(1650.05,-190.45) 1(1650.05,-190.45) 1(1650.31,-177.53) 1(1650.31,-177.53) 1(1650.31,-94.26) 1(1650.31,-94.26) 1(1650.57,-191.23) 1(1650.57,-191.23) 1(1651.32,-191.49) 1(1651.32,-191.49) 1(1651.58,-191.98) 1(1651.58,-191.98) 1(1652.1,-94) 1(1652.1,-94) 1(1652.36,-192.24) 1(1652.36,-192.24) 1(1652.59,-192.75) 1(1652.59,-192.75) 1(1652.59,-107.96) 1(1652.59,-107.96) 1(1653.37,-192.99) 1(1653.37,-192.99) 1(1653.37,-180.82) 1(1653.37,-180.82) 1(1653.62,-193.51) 1(1653.62,-193.51) 1(1653.86,-180.82) 1(1653.86,-180.82) 1(1653.86,-93.25) 1(1653.86,-93.25) 1(1654.38,-193.77) 1(1654.38,-193.77) 1(1654.63,-194.26) 1(1654.63,-194.26) 1(1655.39,-107.21) 1(1655.39,-107.21) 1(1655.39,-194.52) 1(1655.39,-194.52) 1(1655.39,-182.6) 1(1655.39,-182.6) 1(1655.65,-195.03) 1(1655.65,-195.03) 1(1655.65,-92.99) 1(1655.65,-92.99) 1(1655.91,-182.6) 1(1655.91,-182.6) 1(1656.4,-195.29) 1(1656.4,-195.29) 1(1656.66,-195.79) 1(1656.66,-195.79) 1(1657.43,-196.05) 1(1657.43,-196.05) 1(1657.43,-92.23) 1(1657.43,-92.23) 1(1657.67,-196.56) 1(1657.67,-196.56) 1(1658.19,-105.94) 1(1658.19,-105.94) 1(1658.44,-196.8) 1(1658.44,-196.8) 1(1658.7,-197.32) 1(1658.7,-197.32) 1(1659.2,-91.98) 1(1659.2,-91.98) 1(1659.46,-197.57) 1(1659.46,-197.57) 1(1659.71,-198.07) 1(1659.71,-198.07) 1(1660.46,-198.33) 1(1660.46,-198.33) 1(1660.98,-91.22) 1(1660.98,-91.22) 1(1660.98,-105.18) 1(1660.98,-105.18) 1(1661.48,-199.34) 1(1661.48,-199.34) 1(1661.74,-188.69) 1(1661.74,-188.69) 1(1662.25,-199.6) 1(1662.25,-199.6) 1(1662.25,-104.41) 1(1662.25,-104.41) 1(1662.25,-188.69) 1(1662.25,-188.69) 1(1662.51,-200.11) 1(1662.51,-200.11) 1(1662.74,-90.97) 1(1662.74,-90.97) 1(1663.26,-200.37) 1(1663.26,-200.37) 1(1663.52,-104.15) 1(1663.52,-104.15) 1(1663.52,-200.87) 1(1663.52,-200.87) 1(1664.02,-190.71) 1(1664.02,-190.71) 1(1664.27,-201.12) 1(1664.27,-201.12) 1(1664.53,-190.71) 1(1664.53,-190.71) 1(1664.53,-90.19) 1(1664.53,-90.19) 1(1664.79,-103.4) 1(1664.79,-103.4) 1(1665.28,-202.13) 1(1665.28,-202.13) 1(1666.06,-202.39) 1(1666.06,-202.39) 1(1666.06,-103.14) 1(1666.06,-103.14) 1(1666.32,-202.91) 1(1666.32,-202.91) 1(1666.32,-89.95) 1(1666.32,-89.95) 1(1666.81,-193.25) 1(1666.81,-193.25) 1(1667.07,-203.15) 1(1667.07,-203.15) 1(1667.33,-203.66) 1(1667.33,-203.66) 1(1667.33,-193.25) 1(1667.33,-193.25) 1(1667.33,-102.39) 1(1667.33,-102.39) 1(1668.08,-89.18) 1(1668.08,-89.18) 1(1668.08,-203.92) 1(1668.08,-203.92) 1(1668.6,-102.13) 1(1668.6,-102.13) 1(1669.09,-204.93) 1(1669.09,-204.93) 1(1669.86,-205.19) 1(1669.86,-205.19) 1(1669.86,-101.38) 1(1669.86,-101.38) 1(1670.12,-205.68) 1(1670.12,-205.68) 1(1670.88,-88.68) 1(1670.88,-88.68) 1(1670.88,-205.94) 1(1670.88,-205.94) 1(1671.13,-101.12) 1(1671.13,-101.12) 1(1671.63,-197.83) 1(1671.63,-197.83) 1(1671.89,-206.95) 1(1671.89,-206.95) 1(1672.15,-197.83) 1(1672.15,-197.83) 1(1672.41,-100.34) 1(1672.41,-100.34) 1(1672.66,-207.21) 1(1672.66,-207.21) 1(1672.66,-87.91) 1(1672.66,-87.91) 1(1673.16,-207.98) 1(1673.16,-207.98) 1(1673.67,-100.11) 1(1673.67,-100.11) 1(1673.93,-208.22) 1(1673.93,-208.22) 1(1674.17,-208.74) 1(1674.17,-208.74) 1(1674.43,-87.65) 1(1674.43,-87.65) 1(1674.94,-209) 1(1674.94,-209) 1(1674.94,-99.33) 1(1674.94,-99.33) 1(1675.44,-209.75) 1(1675.44,-209.75) 1(1675.69,-201.64) 1(1675.69,-201.64) 1(1676.21,-210.01) 1(1676.21,-210.01) 1(1676.21,-201.64) 1(1676.21,-201.64) 1(1676.21,-99.08) 1(1676.21,-99.08) 1(1676.21,-86.9) 1(1676.21,-86.9) 1(1676.47,-210.52) 1(1676.47,-210.52) 1(1677.22,-210.76) 1(1677.22,-210.76) 1(1677.48,-211.28) 1(1677.48,-211.28) 1(1677.74,-203.4) 1(1677.74,-203.4) 1(1677.98,-86.64) 1(1677.98,-86.64) 1(1678.24,-211.53) 1(1678.24,-211.53) 1(1678.24,-203.4) 1(1678.24,-203.4) 1(1678.24,-98.06) 1(1678.24,-98.06) 1(1678.49,-212.03) 1(1678.49,-212.03) 1(1679.24,-212.29) 1(1679.24,-212.29) 1(1679.5,-97.81) 1(1679.5,-97.81) 1(1680.27,-213.3) 1(1680.27,-213.3) 1(1680.77,-97.05) 1(1680.77,-97.05) 1(1680.77,-85.63) 1(1680.77,-85.63) 1(1681.03,-213.56) 1(1681.03,-213.56) 1(1682.04,-96.79) 1(1682.04,-96.79) 1(1682.04,-214.57) 1(1682.04,-214.57) 1(1682.56,-85.37) 1(1682.56,-85.37) 1(1682.81,-214.83) 1(1682.81,-214.83) 1(1683.05,-215.34) 1(1683.05,-215.34) 1(1683.31,-96.04) 1(1683.31,-96.04) 1(1683.57,-209) 1(1683.57,-209) 1(1683.83,-215.6) 1(1683.83,-215.6) 1(1684.08,-209) 1(1684.08,-209) 1(1684.58,-95.78) 1(1684.58,-95.78) 1(1684.84,-216.61) 1(1684.84,-216.61) 1(1685.1,-95.27) 1(1685.1,-95.27) 1(1685.59,-210.76) 1(1685.59,-210.76) 1(1686.1,-210.76) 1(1686.1,-210.76) 1(1686.36,-95.03) 1(1686.36,-95.03) 1(1686.62,-217.36) 1(1686.62,-217.36) 1(1687.38,-218.14) 1(1687.38,-218.14) 1(1687.63,-94.26) 1(1687.63,-94.26) 1(1688.13,-218.38) 1(1688.13,-218.38) 1(1688.39,-213.3) 1(1688.39,-213.3) 1(1688.65,-219.15) 1(1688.65,-219.15) 1(1688.65,-83.84) 1(1688.65,-83.84) 1(1688.9,-213.3) 1(1688.9,-213.3) 1(1688.9,-94) 1(1688.9,-94) 1(1690.43,-220.16) 1(1690.43,-220.16) 1(1690.93,-215.6) 1(1690.93,-215.6) 1(1690.93,-92.99) 1(1690.93,-92.99) 1(1690.93,-82.83) 1(1690.93,-82.83) 1(1691.44,-218.14) 1(1691.44,-218.14) 1(1691.44,-215.6) 1(1691.44,-215.6) 1(1691.7,-218.14) 1(1691.7,-218.14) 1(1691.7,-216.61) 1(1691.7,-216.61) 1(1691.7,-216.35) 1(1691.7,-216.35) 1(1691.93,-216.87) 1(1691.93,-216.87) 1(1691.93,-219.9) 1(1691.93,-219.9) 1(1692.19,-216.35) 1(1692.19,-216.35) 1(1692.19,-92.73) 1(1692.19,-92.73) 1(1692.19,-219.9) 1(1692.19,-219.9) 1(1692.45,-220.68) 1(1692.45,-220.68) 1(1693.46,-91.98) 1(1693.46,-91.98) 1(1694.73,-91.72) 1(1694.73,-91.72) 1(1695.25,-91.22) 1(1695.25,-91.22) 1(1695.74,-82.08) 1(1695.74,-82.08) 1(1696.52,-90.97) 1(1696.52,-90.97) 1(1696.52,-81.57) 1(1696.52,-81.57) 1(1698.28,-89.95) 1(1698.28,-89.95) 1(1698.28,-81.31) 1(1698.28,-81.31) 1(1699.55,-89.7) 1(1699.55,-89.7) 1(1700.58,-88.92) 1(1700.58,-88.92) 1(1701.85,-88.68) 1(1701.85,-88.68) 1(1702.35,-88.17) 1(1702.35,-88.17) 1(1703.62,-87.91) 1(1703.62,-87.91) 1(1704.88,-87.16) 1(1704.88,-87.16) 1(1706.15,-86.9) 1(1706.15,-86.9) 1(1707.68,-79.03) 1(1707.68,-79.03) 1(1710.22,-84.62) 1(1710.22,-84.62) 1(1711.49,-84.36) 1(1711.49,-84.36) 1(1712,-83.84) 1(1712,-83.84) 1(1713.27,-83.61) 1(1713.27,-83.61) 1(1714.78,-77.26) 1(1714.78,-77.26) 1(1715.3,-82.34) 1(1715.3,-82.34) 1(1717.08,-81.82) 1(1717.08,-81.82) 1(1718.85,-80.55) 1(1718.85,-80.55) 1(1721.13,-79.54) 1(1721.13,-79.54) 1(1721.13,-76.49) 1(1721.13,-76.49) 1(1722.65,-78.02) 1(1722.65,-78.02) 1(1722.91,-77) 1(1722.91,-77)
  round 0 hole 118.11: 4(1340,-845) 4(2436.73,-492.13)

## Via types
v1: diameter 23.62, hole 11.81, TOP to BOTTOM, 9 vias

## Nets (pads, with @x,y where several pads share a name; then routed paths per layer and width w, separated by ;. In a path a pad name is that pad's centre, name@x,y a point inside that pad or via, vN(x,y) a via of type N, cw(c..) or ccw(c..) an arc to the next point about the centre after c; other vN are vias at no path point)
+12V: P3.1 P5.1 U2_DRA.4 U2_DRB.4 U2_DRC.4 U2_DRD.4 | length 3886.4
  TOP w15: U2_DRD.4@2883.11,-840 2883.11,-787.74 2826.24,-730.87 2826.24,-686.23 2850.91,-661.56 2858.44,-661.56 2883.11,-636.89 2883.11,-525.64 2826.24,-468.77 2826.24,-388.25 2859.49,-355 U2_DRB.4@2883.11,-355 2883.11,-275.64 2826.24,-218.77 2826.24,-138.25 2859.49,-105 2906.73,-105 2935.14,-76.59 3361.59,-76.59 P3.1@3465,-180
  BOTTOM w65: P5.1@1376.5,-538.9 1860.39,-55 3165.94,-55 3166.84,-54.09 3339.09,-54.09 P3.1@3465,-180
AUX0_RLY: P1.7 P2.7 U2_DRC.2 | length 1010.7
  TOP w15: P1.7@2285,-240 2291.36,-240 2326.36,-205 U2_DRC.2@2646.89,-205
  BOTTOM w15: P2.7@1985,-750 1985,-675 2285,-375 P1.7@2285,-240
AUX1_RLY: P1.5 P2.5 U2_DRB.2 | length 1435.2
  TOP w15: P2.5@2085,-750 1935.85,-600.85 1935.85,-201.41 1946.41,-190.85 2135.85,-190.85 2294.4,-349.4 2517.67,-349.4 2623.27,-455 U2_DRB.2@2646.89,-455
AUX2_RLY: P1.3 P2.3 U2_DRA.2 | length 1204.5
  TOP w15: P1.3@2085,-240 2085,-304.34 2330.33,-549.67 ; P2.3@2185,-750 2234.15,-799.15 2323.59,-799.15 2334.15,-788.59 2334.15,-671.04 2330.33,-667.22 2330.33,-549.67 ; U2_DRA.2@2646.89,-700 2480.66,-700 2330.33,-549.67
AUX3_RLY: P1.1 P2.1 U2_DRD.2 | length 1074.9
  TOP w15: P1.1@1985,-240 1985,-345 2285,-645 P2.1@2285,-750 ; v1(2570,-920) 2590,-940 U2_DRD.2@2646.89,-940
  BOTTOM w15: P2.1@2285,-750 2455,-920 v1(2570,-920)
BLUE: P3.4 Q1_DRA.3 | length 390.6
  TOP w35: Q1_DRA.3@3093.07,-675 3407.1,-675 3452.1,-630 P3.4@3465,-630
GND: P5.2 Q1_DRA.2 Q1_DRB.2 Q1_DRC.2 Q1_DRD.2 R2_DRA.1 R2_DRB.1 R2_DRC.1 R2_DRD.1 | length 413.4
  TOP w25: v1(2975,-510) 2976.93,-508.07 Q1_DRB.2@2976.93,-465.14 ; Q1_DRD.2@2976.93,-935 3035,-935 v1(3040,-940) ; Q1_DRA.2@2976.93,-712.4 2976.93,-751.93 v1(2980,-755) ; Q1_DRC.2@2976.93,-217.4 2976.93,-256.93 v1(2980,-260) ; R2_DRD.1@3145.69,-825 3170.69,-800 v1(3200,-800) ; R2_DRA.1@3145.69,-600 3170.69,-575 v1(3205,-575) ; R2_DRB.1@3145.69,-350 3160.69,-365 v1(3180,-365) ; R2_DRC.1@3150,-110 v1(3190,-110)
GREEN: P3.3 Q1_DRB.3 | length 393.6
  TOP w30: Q1_DRB.3@3093.07,-427.74 3398.48,-427.74 3450.75,-480 P3.3@3465,-480
NetQ1_DRA_1: Q1_DRA.1 R2_DRA.2 U2_DRA.3 | length 267.7
  TOP w15: U2_DRA.3@2883.11,-700 2904.68,-700 2967.09,-637.6 Q1_DRA.1@2976.93,-637.6 ; Q1_DRA.1@2976.93,-632.3 2992.07,-632.3 3024.37,-600 R2_DRA.2@3111.54,-600
NetQ1_DRB_1: Q1_DRB.1 R2_DRB.2 U2_DRB.3 | length 295.7
  TOP w15: U2_DRB.3@2883.11,-455 2902.42,-455 2967.09,-390.33 Q1_DRB.1@2976.93,-390.33 2976.93,-355.04 2985.72,-346.25 3044.6,-346.25 3048.34,-350 R2_DRB.2@3111.54,-350
NetQ1_DRC_1: Q1_DRC.1 R2_DRC.2 U2_DRC.3 | length 293.8
  TOP w15: U2_DRC.3@2883.11,-205 2904.68,-205 2967.09,-142.6 Q1_DRC.1@2976.93,-142.6 2976.93,-113.79 2985.72,-105 3046.47,-105 3051.47,-110 R2_DRC.2@3116.54,-110
NetQ1_DRD_1: Q1_DRD.1 R2_DRD.2 U2_DRD.3 | length 287.5
  TOP w15: U2_DRD.3@2883.11,-940 2906.73,-940 2961.79,-884.94 2961.79,-865.49 2967.09,-860.2 2986.77,-860.2 3021.97,-825 R2_DRD.2@3111.54,-825
NetR1_DRA_2: R1_DRA.2 U2_DRA.1 | length 58.2
  TOP w15: U2_DRA.1@2657.38,-600 2664.01,-593.37 2664.01,-545.99 R1_DRA.2@2665,-545
NetR1_DRB_2: R1_DRB.2 U2_DRB.1 | length 68.1
  TOP w15: U2_DRB.1@2646.89,-355 2656.39,-355 2664.01,-347.38 2664.01,-300.99 R1_DRB.2@2665,-300
NetR1_DRC_2: R1_DRC.2 U2_DRC.1 | length 68.1
  TOP w15: U2_DRC.1@2646.89,-105 2656.39,-105 2664.01,-97.38 2664.01,-50.99 R1_DRC.2@2665,-50
NetR1_DRD_2: R1_DRD.2 U2_DRD.1 | length 58.2
  TOP w15: U2_DRD.1@2657.38,-840 2664.01,-833.37 2664.01,-785.99 R1_DRD.2@2665,-785
RED: P3.2 Q1_DRC.3 | length 434.1
  TOP w30: Q1_DRC.3@3093.07,-180 3315,-180 P3.2@3465,-330